# Altium PCB PCB_Digisim_23_2023-03-11.pcbdoc
Units mil, origin at the board's own origin, x right, y up, seen from the top; angles counter-clockwise.
Board outline 2151.73 x 1758.03 mil, 2 copper layers (Top Layer, Bottom Layer); 8 components, 17 nets, 47 pads, 20 vias.
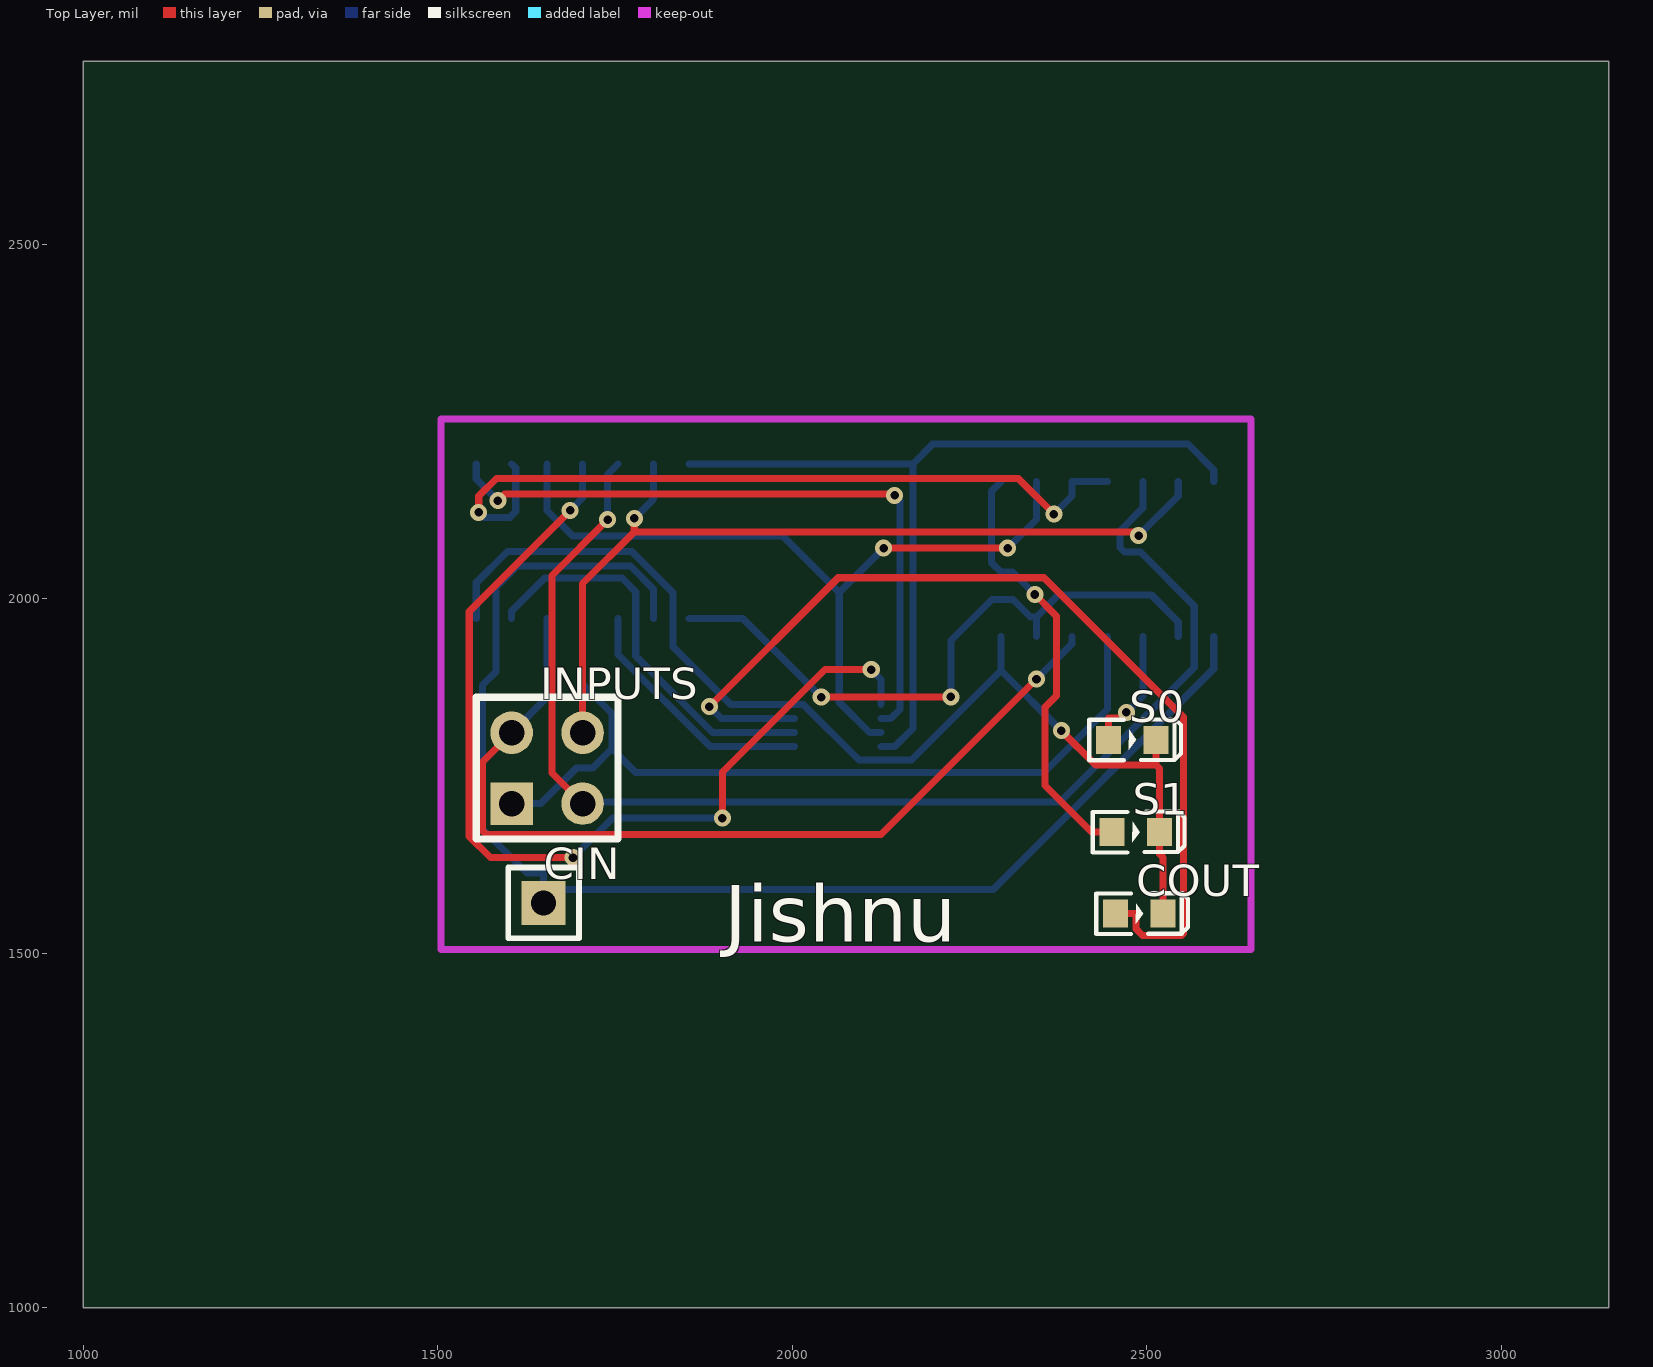
[diagram p0: Top Layer view]
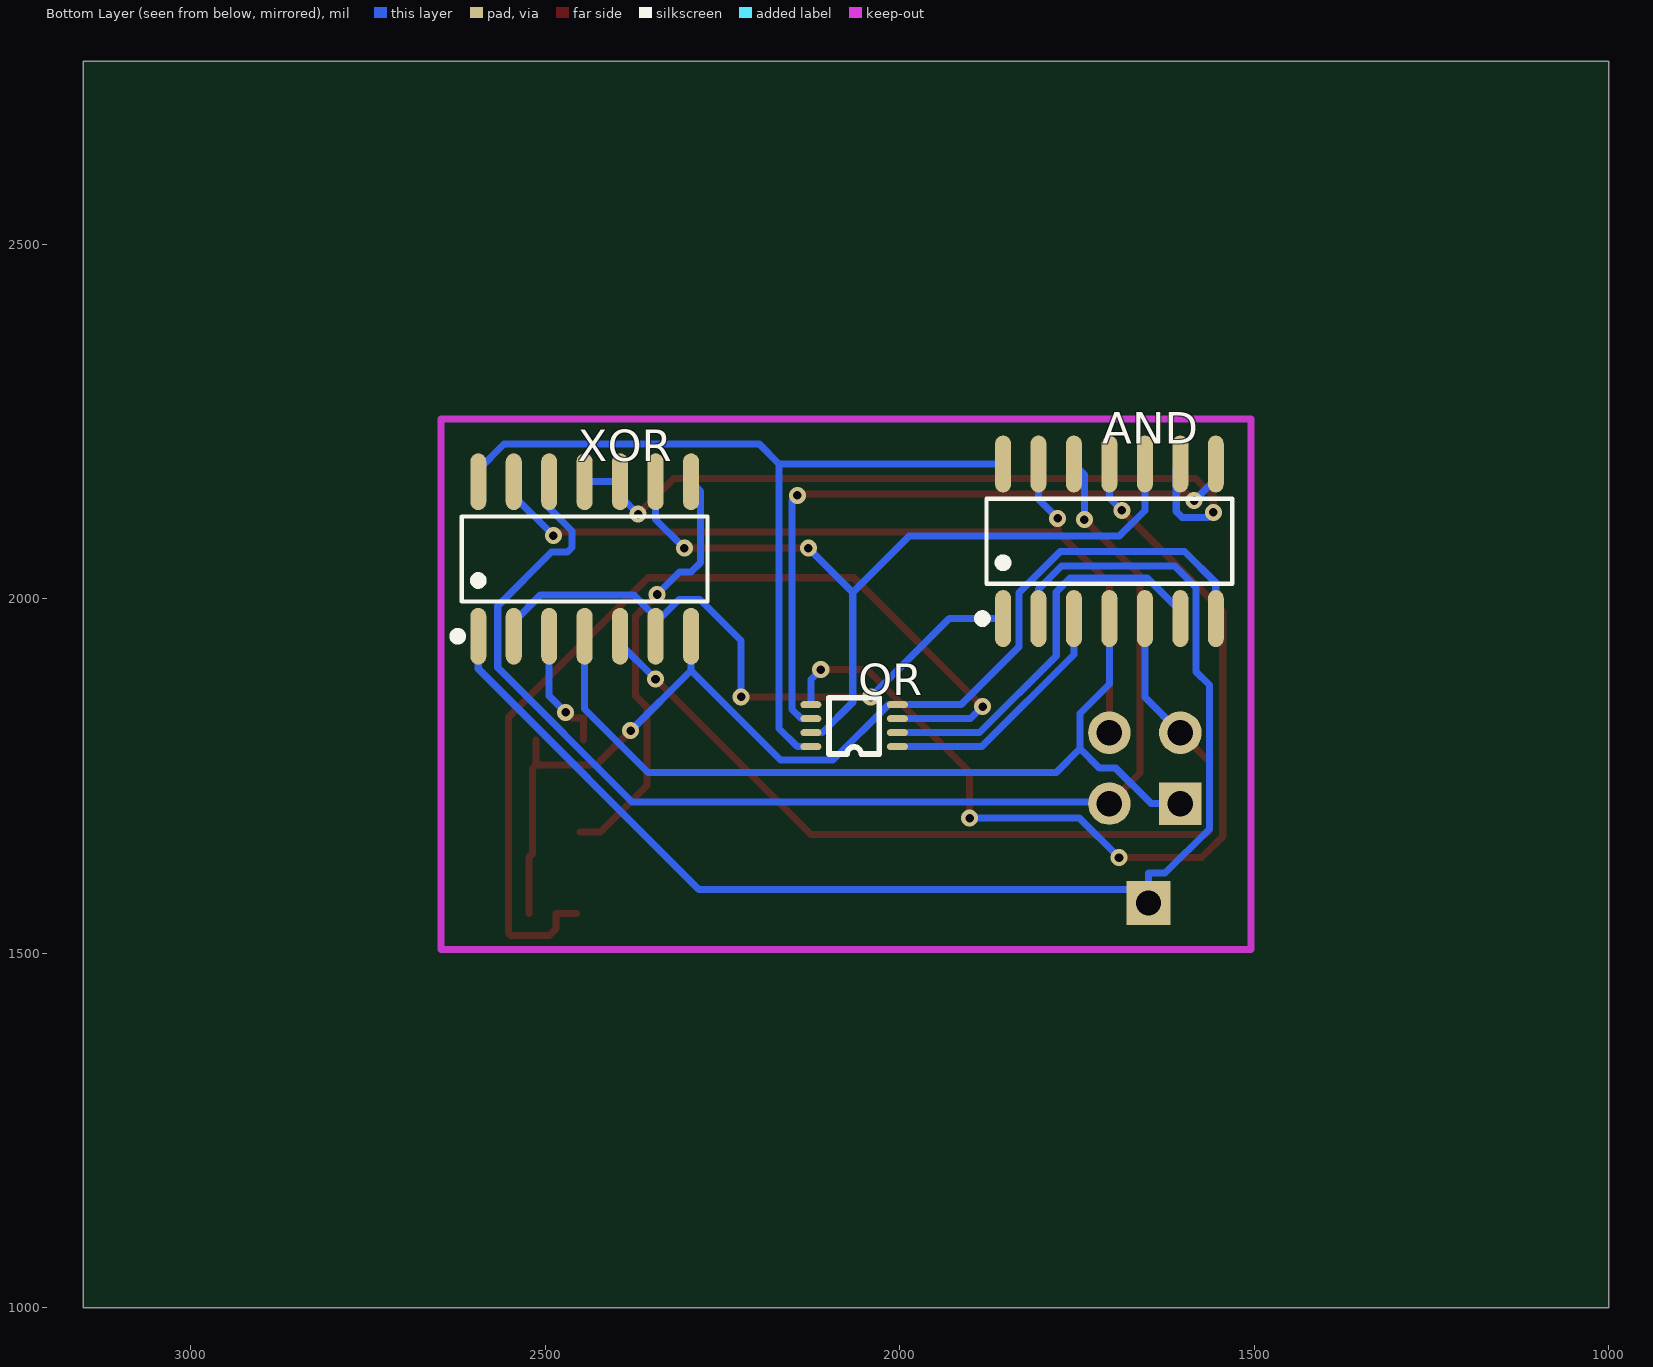
[diagram p1: Bottom Layer view, seen from below]

## Layer stack, top to bottom
Top Layer: signal copper (thickness not stored)
Dielectric: dielectric 12.6, FR-4, Dk 4.8
Bottom Layer: signal copper (thickness not stored)

## Board outline
3151.73,1000 1000,1000 1000,2758.03 3151.73,2758.03

## Components (designator, comment, footprint, x,y, rotation, side; value= is the part's Value field where it differs from the comment)
AND "MM74HCT08M" SOIC-14_L8.7-W3.9-P1.27-LS6.0-BL 1704.41,2080.87 r0 bottom
CIN "HDR-M-2.54_1x1" HDR-M-2.54_1X1 1649.41,1570.87 r0 top
COUT "LED-0603_R" LED0603_RED 2489.41,1555.87 r0 top
INPUTS "HDR-F-2.54_2x2" HDR-F-2.54_2X2 1654.41,1760.87 r0 top
OR "NL27WZ08USG" VSSOP-8_L2.1-W2.4-P0.50-LS3.2-BR 2064.41,1820.87 r0 bottom
S0 "LED-0603_R" LED0603_RED 2479.41,1800.87 r0 top
S1 "LED-0603_R" LED0603_RED 2484.41,1670.87 r0 top
XOR "MC74VHC86DR2G" SOIC-14_L8.7-W3.9-P1.27-LS6.0-BL 2444.41,2055.87 r0 bottom

## Footprints (in the part's own frame and the unit in brackets; to place one, negate y for a bottom-side part, rotate by r counter-clockwise, add the part's x,y. Pads: shape width x height; smd on the part's side, far side on the other; paste and mask are expansions set on the pad)
HDR-F-2.54_2X2 [mil]
  rect 60x60 hole 36: 1(-50,-50)
  round 60 hole 36: 2(-50,50) 3(50,-50) 4(50,50)
  silkscreen extent -100,-100 100,100
HDR-M-2.54_1X1 [mil]
  rect 62x62 hole 35: 1(0,0)
  silkscreen extent -50,-50 50,50
LED0603_RED [mm]
  rect 0.9x1 smd: 1(-0.85,0) 2(0.85,0)
  silkscreen extent -1.54,-0.73 1.75,0.73
SOIC-14_L8.7-W3.9-P1.27-LS6.0-BL [mil]
  oval 22.6x80.24 smd: 1(150,109.02) 2(100,109.02) 3(50,109.02) 4(0,109.02) 5(-50,109.02) 6(-100,109.02) 7(-150,109.02) 8(-150,-109.02) 9(-100,-109.02) 10(-50,-109.02) 11(0,-109.02) 12(50,-109.02) 13(100,-109.02) 14(150,-109.02)
  silkscreen extent -173,-60 185,115
VSSOP-8_L2.1-W2.4-P0.50-LS3.2-BR [mm]
  oval 0.75x0.25 smd: 1(-1.55,0.75) 2(-1.55,0.25) 3(-1.55,-0.25) 4(-1.55,-0.75) 5(1.55,-0.75) 6(1.55,-0.25) 7(1.55,0.25) 8(1.55,0.75)
  silkscreen extent -0.9,-1 0.9,1.02

## Via types
v1: diameter 24.02, hole 12.01, Top Layer to Bottom Layer, tented both sides, 20 vias

## Nets (pads, with @x,y where several pads share a name; then routed paths per layer and width w, separated by ;. In a path a pad name is that pad's centre, name@x,y a point inside that pad or via, vN(x,y) a via of type N, cw(c..) or ccw(c..) an arc to the next point about the centre after c; other vN are vias at no path point)
AND_3: AND.3 OR.1 | length 353.3
  Bottom Layer w10: AND.3 1754.41,1921.39 1884.46,1791.34 OR.1
AND_6: AND.6 OR.2 | length 571.9
  Bottom Layer w10: AND.6 1604.41,1982.34 1651.04,2028.97 1759.83,2028.97 1779.37,2009.43 1779.37,1919.13 1887.47,1811.03 OR.2
AND_8: AND.8 OR.6 | length 965.5
  Top Layer w10: v1(1584.94,2138.09) 1594.29,2147.44 2142.66,2147.44 v1(2144.46,2145.64)
  Bottom Layer w10: AND.8 1554.41,2168.62 v1(1584.94,2138.09) ; OR.6 2138.87,1830.71 2152.01,1843.85 2152.01,2138.09 v1(2144.46,2145.64)
AND_11: AND.11 OR.5 | length 1374
  Top Layer w10: v1(1686.98,2124.38) 1544.54,1981.94 1544.54,1664.73 1574.5,1634.77 v1(1690.89,1634.77) ; v1(1901.63,1690.34) 1901.63,1755.33 2046.28,1899.98 v1(2111.46,1899.98)
  Bottom Layer w10: v1(1686.98,2124.38) 1704.41,2141.81 AND.11 ; v1(1690.89,1634.77) 1746.46,1690.34 v1(1901.63,1690.34) ; v1(2111.46,1899.98) 2125.42,1886.02 OR.5
GND: AND.7 COUT.2 OR.4 S0.2 S1.2 XOR.7 | length 1598.7
  Top Layer w10: v1(2379.5,1813.77) 2428.07,1765.2 2512.87,1765.2 ; S0.2 2512.87,1770.2 2512.87,1765.2 ; COUT.2 2522.87,1635.2 2517.87,1640.2 S1.2 2517.87,1760.2 2512.87,1765.2
  Bottom Layer w10: AND.7 1554.41,2022.42 1598.64,2066.65 1773.76,2066.65 1832.05,2008.36 1832.05,1932.12 1913.77,1850.4 OR.4 2016.12,1850.4 2093.99,1772.53 2168.08,1772.53 2294.41,1898.86 ; XOR.7 2294.41,1898.86 ; v1(2379.5,1813.77) 2294.41,1898.86
OR_3: COUT.1 OR.3 | length 1379.1
  Top Layer w10: v1(1883.32,1847.79) 2064.93,2029.4 2355.03,2029.4 2551.64,1832.79 2551.64,1528.04 2548.73,1525.13 2493.85,1525.13 2484.64,1534.34 2484.64,1555.87 COUT.1
  Bottom Layer w10: v1(1883.32,1847.79) 1900.4,1830.71 OR.3
VCC: AND.14 OR.8 XOR.14 | length 1211.5
  Bottom Layer w10: AND.14 2170.25,2189.89 ; OR.8 2144.52,1791.34 2170.25,1817.07 2170.25,2189.89 ; XOR.14 2594.41,2181.39 2557.97,2217.83 2198.19,2217.83 2170.25,2189.89
XOR_1: AND.2 CIN.1 XOR.1 | length 1911.4
  Bottom Layer w10: CIN.1 CIN.1@1649.41,1590 ; AND.2 1804.41,2013.29 1771.94,2045.76 1612.18,2045.76 1582.05,2015.63 1582.05,1896.7 1563.35,1878 1563.35,1675.3 1625.79,1612.86 1649.41,1612.86 CIN.1@1649.41,1590 ; XOR.1 2594.41,1901 2283.41,1590 CIN.1@1649.41,1590
XOR_2: AND.1 XOR.2 XOR.6 | length 925.9
  Top Layer w10: v1(2040.95,1861.07) 2223.42,1861.07 v1(2223.86,1861.51)
  Bottom Layer w10: AND.1 1930.17,1971.85 v1(2040.95,1861.07) ; v1(2223.86,1861.51) 2223.86,1940.76 2281.84,1998.74 2311.21,1998.74 2335.82,1974.13 XOR.6@2344.41,1974.13 ; XOR.6 XOR.6@2344.41,1974.13 ; XOR.2 2544.41,1967.21 2506.27,2005.35 2375.63,2005.35 XOR.6@2344.41,1974.13
XOR_3: S0.1 XOR.3 | length 176.2
  Top Layer w10: S0.1 2445.94,1831.55 2463.21,1831.55 v1(2471.38,1839.72)
  Bottom Layer w10: v1(2471.38,1839.72) 2494.41,1862.75 XOR.3
XOR_4: AND.4 INPUTS.1 XOR.4 | length 1226.1
  Bottom Layer w10: INPUTS.1 1645.4,1710.87 1695.4,1760.87 1718.3,1760.87 1745.89,1788.46 ; AND.4 1704.41,1879.57 1745.89,1838.09 1745.89,1788.46 ; XOR.4 2444.41,1844.43 2354.92,1754.94 1779.41,1754.94 1745.89,1788.46
XOR_5: AND.5 INPUTS.2 XOR.5 | length 1292.1
  Top Layer w10: INPUTS.2 1563.35,1769.81 1563.35,1672.72 1568.79,1667.28 2125.28,1667.28 v1(2344.5,1886.5)
  Bottom Layer w10: INPUTS.2 1654.41,1860.87 AND.5 ; v1(2344.5,1886.5) 2394.41,1936.41 XOR.5
XOR_8: S1.1 XOR.8 | length 609.8
  Top Layer w10: v1(2342.28,2005.79) 2372.45,1975.62 2372.45,1862.79 2356.43,1846.77 2356.43,1736.67 2422.23,1670.87 S1.1
  Bottom Layer w10: XOR.8 2280.78,2151.26 2280.78,2050.98 2294.29,2037.47 2310.6,2037.47 v1(2342.28,2005.79)
XOR_9: AND.10 OR.7 XOR.9 | length 1131
  Top Layer w10: v1(2128.9,2071.1) v1(2303.84,2071.1)
  Bottom Layer w10: AND.10 1654.41,2124.34 1690.55,2088.2 1986.64,2088.2 2066.32,2008.52 ; OR.7 2109.06,1811.03 2066.32,1853.77 2066.32,2008.52 ; v1(2128.9,2071.1) 2066.32,2008.52 ; v1(2303.84,2071.1) 2344.41,2111.67 XOR.9
XOR_10: AND.9 XOR.10 XOR.11 | length 1099.6
  Top Layer w10: v1(1557.95,2121.55) 1557.95,2144.57 1582.91,2169.53 2318.78,2169.53 v1(2369.08,2119.23)
  Bottom Layer w10: v1(1557.95,2121.55) 1565.14,2114.36 1601.69,2114.36 1610.14,2122.81 1610.14,2184.16 AND.9 ; v1(2369.08,2119.23) 2394.41,2144.56 XOR.10 XOR.11
XOR_12: AND.12 INPUTS.3 XOR.12 | length 1809.8
  Top Layer w10: INPUTS.3 1661.13,1754.15 1661.13,2032.82 v1(1739.57,2111.26)
  Bottom Layer w10: INPUTS.3 1706.94,1713.4 2377.69,1713.4 2566.98,1902.69 2566.98,1989.8 2490.96,2065.82 2468.51,2065.82 2462.1,2072.23 2462.1,2095.51 2494.41,2127.82 XOR.12 ; v1(1739.57,2111.26) 1739.57,2175.05 AND.12
XOR_13: AND.13 INPUTS.4 XOR.13 | length 1233
  Top Layer w10: INPUTS.4 1704.41,2021.25 1777.32,2094.16 ; v1(1777.32,2113.14) 1777.32,2094.16 ; v1(2488.54,2088.89) 2483.27,2094.16 1777.32,2094.16
  Bottom Layer w10: v1(1777.32,2113.14) 1804.41,2140.23 AND.13 ; v1(2488.54,2088.89) 2544.41,2144.76 XOR.13

## Silkscreen, mask and mechanical layers (free items; w line width, h text height)
Top Overlay:
  text "Jishnu" at 1904.41,1515.87 h80